# Altium PCB Gas_Sensor.PcbDoc
Units mm, origin at the board's own origin, x right, y up, seen from the top; angles counter-clockwise.
Board outline 23.19 x 10.54 mm, 2 copper layers (Top Layer, Bottom Layer), stack 1.595 mm thick; 5 components, 6 nets, 28 pads, 10 vias.
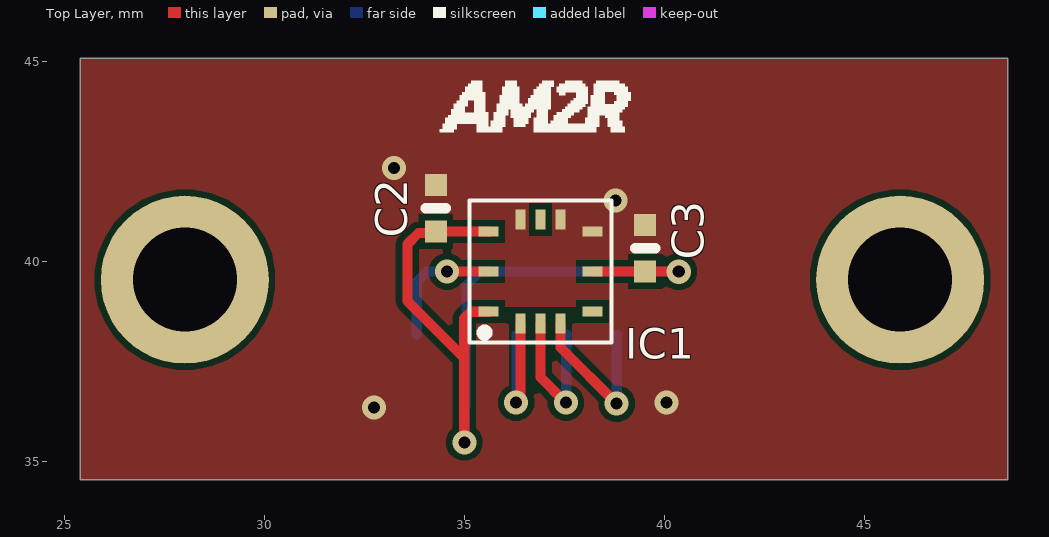
[diagram p0: Top Layer view]
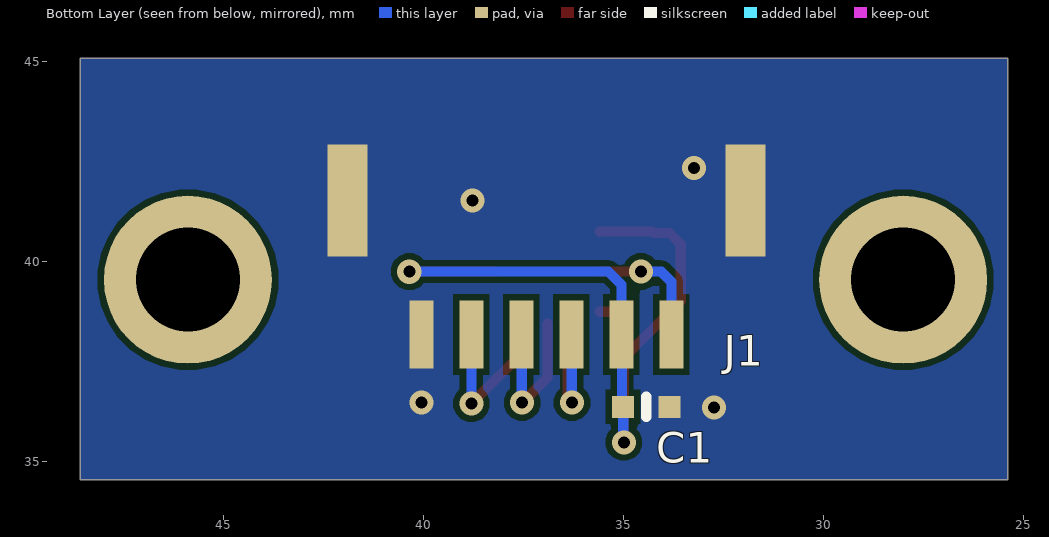
[diagram p1: Bottom Layer view, seen from below]
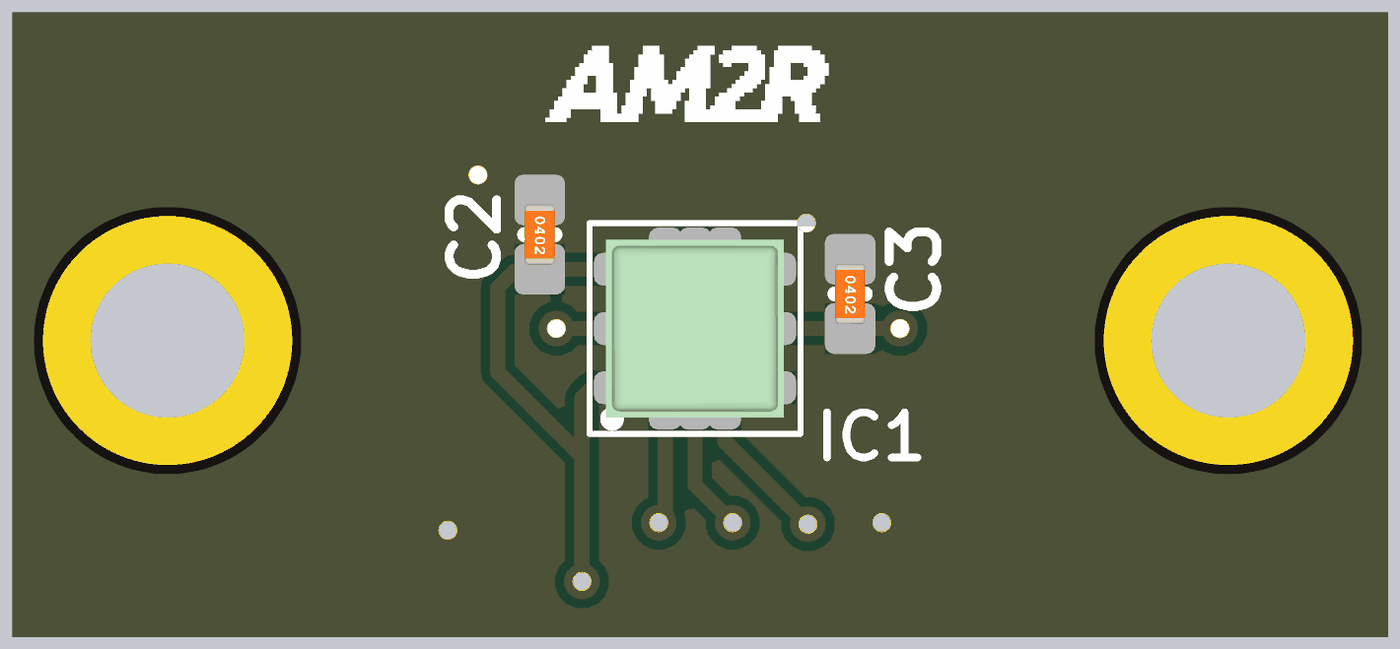
[diagram p2: 3D render of the assembled board from above, using the file's embedded part models]

## Layer stack, top to bottom
Top Solder: solder mask 0.0254, Solder Resist, Dk 3.5
Top Layer: signal copper 0.0356
Dielectric 1: core 1.524, FR-4, Dk 4.6
Bottom Layer: signal copper 0.0356
Bottom Solder: solder mask 0.0254, Solder Resist, Dk 3.5

## Board outline
25.4,34.544 48.59,34.544 48.59,45.085 25.4,45.085

## Design rules (kind name [scope] priority, off if disabled: settings)
Clearance [All] p1: gap=0.152 ignorepadtopadclearanceinfootprint=FALSE except(0: Arc-Hole Track-Hole SMDPad-Hole THPad-Hole Via-Hole Fill-Hole Poly-Hole Region-Hole Text-Hole)
ComponentClearance [All] p1: gap=0.254 collisioncheckmode=3 verticalgap=0.254 showdistances=TRUE
HoleSize [All] p1: absolutevalues=TRUE maxlimit=5.08 minlimit=0.3 maxpercent=80.000 minpercent=20.000
HoleToHoleClearance [All] p1: gap=0.55 allowstackedmicrovias=TRUE
MinimumSolderMaskSliver [All] p1: minsoldermaskwidth=0.152
PasteMaskExpansion [All] p1: expansion=0.152
PlaneConnect [All] p1: planeconnectstyle=Direct reliefexpansion=0.508 reliefentries=4 reliefconductorwidth=0.254 reliefairgap=0.254
PolygonConnect [All] p1: connectstyle=Direct reliefconductorwidth=0.254 reliefentries=4 polygonreliefangle="90 Angle" airgapwidth=0.254
RoutingTopology [All] p1: topology=Daisy_Balanced
RoutingVias [All] p1: holewidth=0.305 width=0.61 viastyle="Through Hole" minholewidth=0.305 minwidth=0.61 maxholewidth=1.27 maxwidth=2.54
SilkToBoardRegionClearance SilkToBoardRegionClearance_1 [All] p2:
SilkToSilkClearance [All] p1: silktosilkclearance=0.152
SilkToSolderMaskClearance [IsPad] p1: minsilkscreentomaskgap=0.152 clearancetoexposedcopper=TRUE
SolderMaskExpansion [All] p1: expansion=0.152 istentingtop=FALSE
Width [All] p1: maxlimit=2.54 minlimit=0.152 preferedwidth=0.254
21 further rules are at their usual default settings.

## Classes and differential pairs
component class U_Connectors: J1 J?
component class U_ZMOD4510: C1 C2 C3 IC1

## Components (designator, comment, footprint, x,y, rotation, side; value= is the part's Value field where it differs from the comment)
C1 "1µF" SMD-0402C 34.438,36.369 r90 bottom
C2 "0.10µF" SMD-0402C 34.29,41.335 r180 top
C3 "0.10µF" SMD-0402C 39.522,40.335 r180 top
IC1 "ZMOD4510AI4V" ZMOD4xxx_AI4_IP67 36.906,39.751 r0 top
J1 "BM06B-GHS-TBT_LF__SN_" BM06BGHSTBTLFSN 36.936,40.401 r0 bottom

## Footprints (in the part's own frame and the unit in brackets; to place one, negate y for a bottom-side part, rotate by r counter-clockwise, add the part's x,y. Pads: shape width x height; smd on the part's side, far side on the other; paste and mask are expansions set on the pad)
BM06BGHSTBTLFSN [mm]
  rect 0.6x1.7 smd: 1(3.125,2.225) 2(1.875,2.225) 3(0.625,2.225) 4(-0.625,2.225) 5(-1.875,2.225) 6(-3.125,2.225)
  rect 1x2.8 smd: MP1(4.975,-1.125) MP2(-4.975,-1.125)
  body extent -5.42,-2.47 5.33,2.48, height 4.26
SMD-0402C [mm]
  rect 0.55x0.55 smd: 1(0,0.584) 2(0,-0.584)
  silkscreen extent -0.25,0 0.25,0, body extent -0.25,-0.51 0.25,0.51, height 0.51
ZMOD4xxx_AI4_IP67 [mm]
  rect 0.25x0.5 smd: 1(-0.5,-1.3) 2(0,-1.3) 3(0.5,-1.3) 7(0.5,1.3) 8(0,1.3) 9(-0.5,1.3)
  rect 0.5x0.25 smd: 4(1.3,-1) 5(1.3,0) 6(1.3,1) 10(-1.3,1) 11(-1.3,0) 12(-1.3,-1)
  silkscreen extent -1.78,-1.78 1.78,1.78, body extent -1.5,-1.5 1.5,1.5, height 0.7

## Part data
C1: library part GCM155C71A105KE38D, "CAP CER 1UF 10V X7S 0402", Digi-Key Part Number=490-13409-1-ND, Manufacturer="Murata Electronics North America", Operating Temperature="-55°C ~ 125°C", Package / Case="0402 (1005 Metric)", Ratings=AEC-Q200, Temperature Coefficient=X7S, Tolerance=±10%, Voltage=10V, @ qty=0, Applications=Automotive, Datasheets=http://www.murata.com/~/media/webrenewal/support/library/catalog/products/capacitor/mlcc/c03e.ashx, Factory Stock=0, Features=-, Height - Seated (Max)=-, Image=//media.digikey.com/Renders/Murata%20Renders/ZRB-SERIES-0402.jpg, Lead Spacing=-, Lead Style=-, Minimum Quantity=1, Mounting Type="Surface Mount, MLCC", Packaging="Cut Tape (CT)", Part Number=GCM155C71A105KE38D, Part Status=Active, Quantity Available=7240, Series=GCM, Size / Dimension="0.039\" L x 0.020\" W (1.00mm x 0.50mm)", Thickness (Max)="0.022\" (0.55mm)", Unit Price (USD)=0.12
C2 C3: library part GCM155R71C104KA55D, "CAP CER 0.1UF 16V X7R 0402", Digi-Key Part Number=490-4759-1-ND, Manufacturer="Murata Electronics North America", Operating Temperature="-55°C ~ 125°C", Package / Case="0402 (1005 Metric)", Ratings=AEC-Q200, Temperature Coefficient=X7R, Tolerance=±10%, Voltage=16V, @ qty=0, Applications=Automotive, Datasheets=http://www.murata.com/~/media/webrenewal/support/library/catalog/products/capacitor/mlcc/c03e.ashx, Factory Stock=0, Features=-, Height - Seated (Max)=-, Image=//media.digikey.com/Renders/Murata%20Renders/ZRB-SERIES-0402.jpg, Lead Spacing=-, Lead Style=-, Minimum Quantity=1, Mounting Type="Surface Mount, MLCC", Packaging="Cut Tape (CT)", Part Number=GCM155R71C104KA55D, Part Status=Active, Quantity Available=734194, Series=GCM, Size / Dimension="0.039\" L x 0.020\" W (1.00mm x 0.50mm)", Thickness (Max)="0.022\" (0.55mm)", Unit Price (USD)=0.1
IC1: "The ZMOD4510 gas sensor platform detects air quality in a variety of indoor and outdoor applications. The module is a 12-pin LGA assembly (standard version 3.0mm x 3.0mm x 0.7mm) that consists of a gas sense element and a CMOS signal conditioning IC. The modules sense element consists of a heater element on a silicon-based MEMS structure and a metal-oxide (MOx) chemiresistor. The signal conditioner controls the sensor temperature and measures the MOx resistance, which is a function of the gas concentration   Source:  Datasheet", Manufacturer_Name="Renesas Electronics", DeviceSetName=ZMOD4510AI4V, GateName_1=G$1, Height=1mm, LibraryName=ZMOD4510AI4V, Manufacturer_Part_Number=ZMOD4510AI4V, Mouser_Part_Number=972-ZMOD4510AI4V, Mouser_Price-Stock=https://www.mouser.co.uk/ProductDetail/Renesas-Electronics/ZMOD4510AI4V?qs=DRkmTr78QARdQZKp0qnVWA%3D%3D, SymbolName_1=ZMOD4510AI4V
J1: "BM06B Series 6 Position 1.25 mm Pitch Surface Mount Top Entry Shrouded Header   Source:  Datasheet", Manufacturer_Name="JST (JAPAN SOLDERLESS TERMINALS)", Manufacturer_Part_Number=BM06B-GHS-TBT(LF)(SN), DeviceSetName=BM06B-GHS-TBT_LF__SN_, GateName_1=G$1, Height=4.05mm, LibraryName=BM06B-GHS-TBT_LF__SN_, SymbolName_1=BM06B-GHS-TBT_LF__SN_

## Free pads (board coordinates)
  round 4.2 hole 2.6 unplated: 1(28.016,39.548) 1(45.898,39.548)

## Via types
v1: diameter 0.6, hole 0.3, Top Layer to Bottom Layer, tented both sides, 9 vias
v2: diameter 0.61, hole 0.305, Top Layer to Bottom Layer, tented both sides, 1 vias

## Nets (pads, with @x,y where several pads share a name; then routed paths per layer and width w, separated by ;. In a path a pad name is that pad's centre, name@x,y a point inside that pad or via, vN(x,y) a via of type N, cw(c..) or ccw(c..) an arc to the next point about the centre after c; other vN are vias at no path point)
GND: C1.2 C2.2 C3.2 IC1.6 IC1.7 IC1.9 J1.1 J1.MP1 J1.MP2
  other v1: 32.741,36.347 40.056,36.474 38.786,41.529 33.249,42.342
INT: IC1.3 J1.2 | length 4.3
  Top Layer w0.254: IC1.3 37.406,37.854 v1(38.811,36.449)
  Bottom Layer w0.254: v1(38.811,36.449) J1.2
RST: IC1.11 J1.6 | length 3.2
  Top Layer w0.254: v1(34.569,39.751) IC1.11
  Bottom Layer w0.254: J1.6@33.809,38.174 J1.6 33.811,39.501 34.061,39.751 v1(34.569,39.751)
SCL: IC1.1 J1.4 | length 3.7
  Top Layer w0.254: v1(36.297,36.474) 36.297,36.571 36.406,36.68 IC1.1
  Bottom Layer w0.254: v1(36.297,36.474) 36.304,36.482 36.304,38.169 J1.4
SDA: IC1.2 J1.3 | length 3.9
  Top Layer w0.254: IC1.2 36.906,37.109 v1(37.541,36.474)
  Bottom Layer w0.254: v1(37.541,36.474) 37.551,36.484 37.551,38.166 J1.3
VDD: C1.1 C2.1 C3.1 IC1.5 IC1.10 IC1.12 J1.5 | length 20.9
  Top Layer w0.254: v1(35.001,35.484) 35.001,37.592 ; IC1.12 35.604,38.749 35.168,38.749 35.001,38.583 35.001,37.592 ; IC1.10@35.608,40.749 IC1.10 C2.1 34.255,40.716 33.858,40.716 33.579,40.437 33.579,39.014 35.001,37.592 ; IC1.5 C3.1 v2(40.361,39.751)
  Bottom Layer w0.254: v1(35.001,35.484) 35.014,35.496 35.014,36.36 C1.1 35.044,36.39 J1.5@35.044,38.159 ; J1.5 35.061,39.43 35.382,39.751 v2(40.361,39.751)
pads on no net: IC1.4 IC1.8

## Polygon pours and split planes (outlines as drawn)
GND on Bottom Layer "BottomLayer-GND" (solid, pour order 1): 25.4,34.544 48.59,34.544 48.59,45.085 25.4,45.085
GND on Top Layer "TopLayer-GND" (solid, pour order 0): 25.4,34.544 48.59,34.544 48.59,45.085 25.4,45.085

## Silkscreen, mask and mechanical layers (free items; w line width, h text height)
Top Overlay:
  region: 184 vertices and 2 holes, not listed, extent 34.386,43.235 39.161,44.518
Top Solder:
  rectangle: 37.668,40.97 37.846,41.021
  rectangle: 37.643,38.481 37.821,38.532
  rectangle: 35.992,38.481 36.17,38.532
  rectangle: 35.966,40.97 36.144,41.021
Outline:
  the board outline again, w0.1